# EAGLE board Equalizer_VUMeter (EAGLE 9.6.2), part 1 of 2
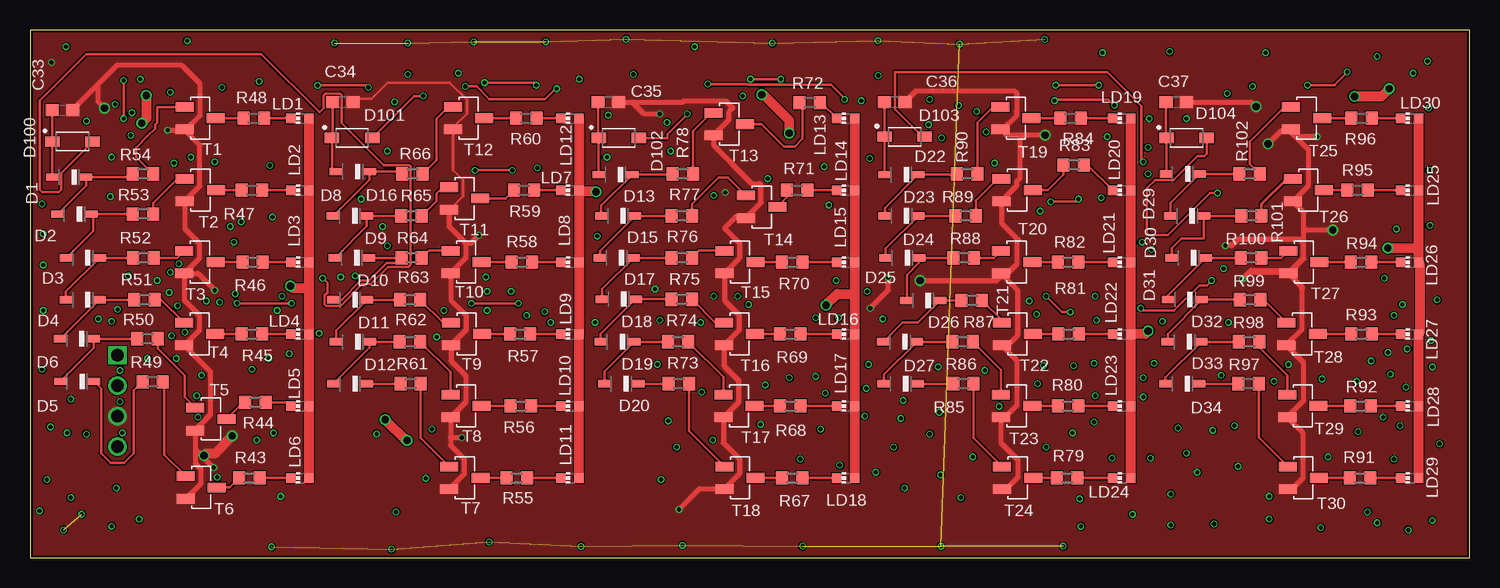
[diagram p0: board, top side]
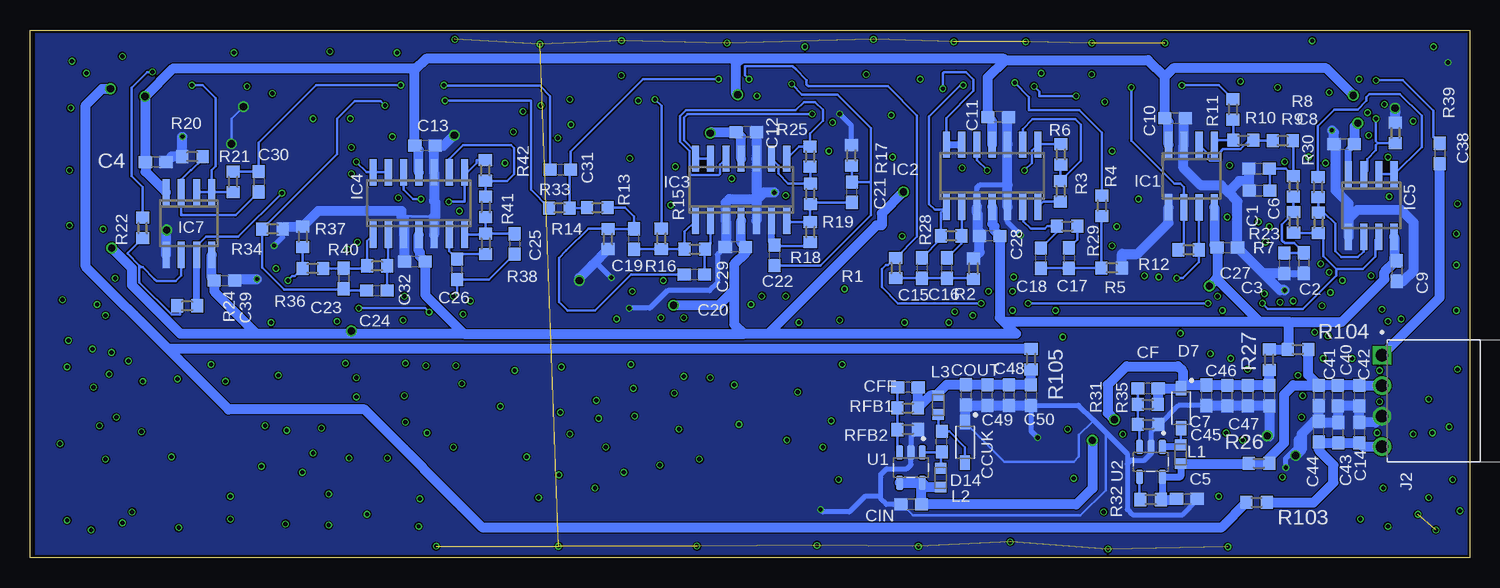
[diagram p1: board, bottom side, seen from below]

Size 120 x 44 mm. Coordinates in mm from the lower left corner, seen from the top.
Outline: 0,44 0,0 120,0 120,44 0,44
Copper layers (1*16): Top 0.018mm / dielectric 1.55mm / Bottom 0.018mm
Design rules "Multi-CB_2L_100µm-Tracks_OL35µm": minimum track width 0.1mm, minimum drill 0.2mm, track to track 0.1mm, track to pad 0.1mm, pad to pad 0.1mm, via to via 0.1mm, smd to smd 0mil, copper to edge 0.2mm, drill to drill 0.2mm, minimum pad ring 0.125mm, minimum via ring 0.1mm, stop-mask expansion 2mil, vias tented up to drill 0.45mm, thermal gap 0.2mm
Net classes: 0 default: width 0.003 mm, drill 0.1 mm

## Footprints (pad centres in the part's own frame; a part is rotated, then mirrored left to right if it is on the bottom)
C0603 = smd 1.1 x 1: 1 -0.85,0; 2 0.85,0
SODFL2512X100N = smd 1.05 x 0.6: A 1.4,0; C -1.4,0
SOD3715X135L32X57N = smd 1.21 x 0.84: 1 -1.68,0; 2 1.68,0
SO08 = smd 0.6 x 2.2: 1 -1.905,-2.6; 2 -0.635,-2.6; 3 0.635,-2.6; 4 1.905,-2.6; 5 1.905,2.6; 6 0.635,2.6; 7 -0.635,2.6; 8 -1.905,2.6
SO14 = smd 0.6 x 2.2: 1 -3.81,-2.6; 2 -2.54,-2.6; 3 -1.27,-2.6; 4 0,-2.6; 5 1.27,-2.6; 6 2.54,-2.6; 7 3.81,-2.6; 8 3.81,2.6; 9 2.54,2.6; 10 1.27,2.6; 11 0,2.6; 12 -1.27,2.6; 13 -2.54,2.6; 14 -3.81,2.6
TE_640455-4 = drill 1.02 pad 1.37 square: 1 0,0 | drill 1.02 pad 1.37: 2 -2.54,0; 3 -5.08,0; 4 -7.62,0
INDC1608X95N = smd 0.9 x 0.97: 1 -0.785,0; 2 0.785,0
CHIP-LED0603 = smd 0.8 x 0.8: A 0,-0.75; C 0,0.75
R0603 = smd 1 x 1.1: 1 -0.85,0; 2 0.85,0
SOT23-3 = smd 0.8 x 1.5: 1 -0.6,-1.35; 2 1.3,-1.35; 3 0.35,1.25
SOT95P280X145-5N = smd 1.21 x 0.59: 1 -1.255,0.95; 2 -1.255,0; 3 -1.255,-0.95; 4 1.255,-0.95; 5 1.255,0.95

## Placement (x,y rotation side)
C1  220n  [C0603]  17.54,32.42 180 bottom
C2  220n  [C0603]  13.81,24.56 270 bottom
C3  100n  [C0603]  15.44,24.53 270 bottom
C4  100n  [C0603]  109.52,32.98 180 bottom
C5  2.2 uF  [C0603]  23.56,4.9 0 bottom
C6  100n  [C0603]  17.5,30.6 180 bottom
C7  4.7 uF  [C0603]  21.95,13.52 270 bottom
C8  100n  [C0603]  10.45,34.49 0 bottom
C9  100n  [C0603]  6.08,23.9 270 bottom
C10  100n  [C0603]  24.55,36.63 180 bottom
C11  100n  [C0603]  39.3,36.75 180 bottom
C12  100n  [C0603]  60.28,35.5 180 bottom
C13  100n  [C0603]  87.07,34.35 180 bottom
C14  10u  [C0603]  9.18,10.41 270 bottom
C15  100n  [C0603]  45.65,24.15 270 bottom
C16  100n  [C0603]  43.55,24.14 90 bottom
C17  100n  [C0603]  33.39,24.98 270 bottom
C18  100n  [C0603]  35.73,24.97 90 bottom
C19  10n  [C0603]  69.63,26.56 90 bottom
C20  10n  [C0603]  64.61,23.61 0 bottom
C21  10n  [C0603]  51.48,30.47 90 bottom
C22  10n  [C0603]  57.92,25.22 90 bottom
C23  10n  [C0603]  93.86,23.27 270 bottom
C24  10n  [C0603]  91.09,22.28 0 bottom
C25  10n  [C0603]  79.6,26.15 270 bottom
C26  10n  [C0603]  84.38,24.04 90 bottom
C27  100n  [C0603]  20.19,25.84 0 bottom
C28  100n  [C0603]  40,26.82 180 bottom
C29  100n  [C0603]  61.2,25.91 180 bottom
C30  12n  [C0603]  100.92,31.35 270 bottom
C31  15n  [C0603]  75.8,32.35 180 bottom
C32  100n  [C0603]  87.91,24.68 180 bottom
C33  200u  [C0603]  2.71,37.3 0 top
C34  100u  [C0603]  26.09,38 0 top
C35  100u  [C0603]  48.2,38 0 top
C36  100u  [C0603]  72.08,38 0 top
C37  200u  [C0603]  95.55,38 0 top
C38  100n  [C0603]  2.5,33.7 270 bottom
C39  100n  [C0603]  103.79,23.1 0 bottom
C40  10u  [C0603]  10.96,13.5 90 bottom
C41  10u  [C0603]  12.56,13.51 270 bottom
C42  10u  [C0603]  9.19,13.5 270 bottom
C43  10u  [C0603]  10.95,10.41 90 bottom
C44  10u  [C0603]  12.56,10.51 90 bottom
C45  10u  [C0603]  20.2,13.5 90 bottom
C46  10u  [C0603]  18.5,13.5 270 bottom
C47  10u  [C0603]  16.7,13.5 270 bottom
C48  10u  [C0603]  40.2,13.55 90 bottom
C49  10u  [C0603]  38.4,13.55 270 bottom
C50  10u  [C0603]  36.55,13.55 270 bottom
CCUK  1 uF  [C0603]  44,9.66 90 bottom
CF  220 pF  [C0603]  26.8,14.1 180 bottom
CFF  330 pF  [C0603]  46.81,14.2 180 bottom
CIN  22 uF  [C0603]  46.54,4.42 180 bottom
COUT  22 uF  [C0603]  41.98,13.57 270 bottom
D1  1N4148WS  [SODFL2512X100N]  3.27,31.72 180 top
D2  1N4148WS  [SODFL2512X100N]  3.71,28.65 180 top
D3  1N4148WS  [SODFL2512X100N]  4.41,25 180 top
D4  1N4148WS  [SODFL2512X100N]  4.4,21.5 180 top
D5  1N4148WS  [SODFL2512X100N]  3.93,14.7 180 top
D6  1N4148WS  [SODFL2512X100N]  3.9,18.25 180 top
D7  [SOD3715X135L32X57N]  24.04,12.46 270 bottom
D8  1N4148WS  [SODFL2512X100N]  26.67,28.5 180 top
D9  1N4148WS  [SODFL2512X100N]  26.84,25 180 top
D10  1N4148WS  [SODFL2512X100N]  26.69,21.5 180 top
D11  1N4148WS  [SODFL2512X100N]  26.92,18 180 top
D12  1N4148WS  [SODFL2512X100N]  26.69,14.5 180 top
D13  1N4148WS  [SODFL2512X100N]  48.81,31.95 180 top
D14  [SOD3715X135L32X57N]  42.05,9.61 270 bottom
D15  1N4148WS  [SODFL2512X100N]  49.02,28.5 180 top
D16  1N4148WS  [SODFL2512X100N]  26.91,32.2 180 top
D17  1N4148WS  [SODFL2512X100N]  48.9,25 180 top
D18  1N4148WS  [SODFL2512X100N]  49.09,21.55 180 top
D19  1N4148WS  [SODFL2512X100N]  48.97,18 180 top
D20  1N4148WS  [SODFL2512X100N]  49.29,14.5 180 top
D22  1N4148WS  [SODFL2512X100N]  72.64,31.95 180 top
D23  1N4148WS  [SODFL2512X100N]  72.65,28.5 180 top
D24  1N4148WS  [SODFL2512X100N]  72.72,25 180 top
D25  1N4148WS  [SODFL2512X100N]  74.46,21.45 180 top
D26  1N4148WS  [SODFL2512X100N]  72.53,18 180 top
D27  1N4148WS  [SODFL2512X100N]  72.59,14.5 180 top
D29  1N4148WS  [SODFL2512X100N]  96.09,32 180 top
D30  1N4148WS  [SODFL2512X100N]  96.46,28.5 180 top
D31  1N4148WS  [SODFL2512X100N]  96.59,25 180 top
D32  1N4148WS  [SODFL2512X100N]  96.28,21.51 180 top
D33  1N4148WS  [SODFL2512X100N]  96.24,18 180 top
D34  1N4148WS  [SODFL2512X100N]  96.07,14.5 180 top
D100  MMSZ5226B-7-F  [SOD3715X135L32X57N]  3.55,34.7 0 top
D101  MMSZ5226B-7-F  [SOD3715X135L32X57N]  26.85,35 0 top
D102  MMSZ5226B-7-F  [SOD3715X135L32X57N]  49.09,35 0 top
D103  MMSZ5226B-7-F  [SOD3715X135L32X57N]  72.91,35.1 0 top
D104  MMSZ5226B-7-F  [SOD3715X135L32X57N]  96.41,35 0 top
IC1  TL072D  [SO08]  23.18,31.82 180 bottom
IC2  TL074D  [SO14]  39.79,31.84 0 bottom
IC3  TL074D  [SO14]  60.72,30.67 0 bottom
IC4  TL074D  [SO14]  87.59,29.53 0 bottom
IC5  TL072D  [SO08]  8.19,29.36 180 bottom
IC7  TL072D  [SO08]  106.75,27.86 180 bottom
J2  640455-4  [TE_640455-4]  7.29,16.88 90 bottom
L1  10 uH  [INDC1608X95N]  24.08,8.61 90 bottom
L2  10 uH  [INDC1608X95N]  44.07,6.66 90 bottom
L3  10 uH  [INDC1608X95N]  44.29,12.72 90 bottom
LD1  [CHIP-LED0603]  22.5,36.64 90 top
LD2  [CHIP-LED0603]  22.5,30.64 90 top
LD3  [CHIP-LED0603]  22.5,24.64 90 top
LD4  [CHIP-LED0603]  22.5,18.64 90 top
LD5  [CHIP-LED0603]  22.5,12.64 90 top
LD6  [CHIP-LED0603]  22.5,6.64 90 top
LD7  [CHIP-LED0603]  45,30.64 90 top
LD8  [CHIP-LED0603]  45,24.64 90 top
LD9  [CHIP-LED0603]  45,18.64 90 top
LD10  [CHIP-LED0603]  45,12.64 90 top
LD11  [CHIP-LED0603]  45,6.64 90 top
LD12  [CHIP-LED0603]  45,36.64 90 top
LD13  [CHIP-LED0603]  68,36.64 90 top
LD14  [CHIP-LED0603]  68,30.64 90 top
LD15  [CHIP-LED0603]  68,24.64 90 top
LD16  [CHIP-LED0603]  68,18.64 90 top
LD17  [CHIP-LED0603]  68,12.64 90 top
LD18  [CHIP-LED0603]  68,6.64 90 top
LD19  [CHIP-LED0603]  91,36.64 90 top
LD20  [CHIP-LED0603]  91,30.64 90 top
LD21  [CHIP-LED0603]  91,24.64 90 top
LD22  [CHIP-LED0603]  91,18.64 90 top
LD23  [CHIP-LED0603]  91,12.64 90 top
LD24  [CHIP-LED0603]  91,6.64 90 top
LD25  [CHIP-LED0603]  115,30.64 90 top
LD26  [CHIP-LED0603]  115,24.64 90 top
LD27  [CHIP-LED0603]  115,18.64 90 top
LD28  [CHIP-LED0603]  115,12.64 90 top
LD29  [CHIP-LED0603]  115,6.64 90 top
LD30  [CHIP-LED0603]  115,36.64 90 top
R1  3.9K  [R0603]  47.83,24.14 270 bottom
R2  3.7K  [R0603]  41.35,24.09 270 bottom
R3  3.3k  [R0603]  34.09,30.56 90 bottom
R4  1.62K  [R0603]  30.65,29.34 270 bottom
R5  1.54K  [R0603]  29.82,24.16 180 bottom
R6  35K  [R0603]  34.07,33.62 90 bottom
R7  10K  [R0603]  14.67,27.96 90 bottom
R8  10K  [R0603]  14.68,30.96 90 bottom
R9  3K  [R0603]  15.56,34.77 180 bottom
R10  23.2K  [R0603]  18.86,34.81 180 bottom
R11  3.3k  [R0603]  19.73,37.38 90 bottom
R12  35K  [R0603]  23.42,25.66 0 bottom
R13  18.2K  [R0603]  72.7,29.19 0 bottom
R14  5.9K  [R0603]  71.82,26.57 90 bottom
R15  53,6K  [R0603]  64.58,25.72 180 bottom
R16  9.76K  [R0603]  67.37,26.59 90 bottom
R17  3.16K  [R0603]  51.52,33.53 270 bottom
R18  29.1K  [R0603]  54.95,27.15 90 bottom
R19  3.3k  [R0603]  54.94,30.33 90 bottom
R20  4K  [R0603]  106.47,33.45 0 bottom
R21  2K  [R0603]  103.07,31.33 90 bottom
R22  3,3K  [R0603]  110.61,27.49 90 bottom
R23  120K  [R0603]  12.6,27.93 270 bottom
R24  22K  [R0603]  106.9,21 0 bottom
R25  35K  [R0603]  54.97,33.44 90 bottom
R26  0  [R0603]  17.55,7.85 180 bottom
R27  0  [R0603]  16.7,16.5 90 bottom
R28  13K  [R0603]  43.21,26.84 180 bottom
R29  5.23K  [R0603]  33.53,27.64 0 bottom
R30  20K  [R0603]  12.63,30.89 270 bottom
R31  68 K  [R0603]  26.81,12.76 0 bottom
R32  51K  [R0603]  26.57,4.83 0 bottom
R33  10.2K  [R0603]  75.87,29.15 180 bottom
R34  1.82K  [R0603]  99.79,27.4 180 bottom
R35  13.3K  [R0603]  26.78,11.1 0 bottom
R36  6.2K  [R0603]  96.43,24.12 180 bottom
R37  1.13K  [R0603]  97.26,26.75 270 bottom
R38  18.2K  [R0603]  82.02,26.17 90 bottom
R39  15.5K  [R0603]  6.18,35.42 90 bottom
R40  29.4K  [R0603]  91.06,24.33 180 bottom
R41  3.3k  [R0603]  82.01,29.24 90 bottom
R42  35K  [R0603]  82.04,32.29 90 bottom
R43  1K  [R0603]  18.28,6.64 180 top
R44  1K  [R0603]  18.81,12.94 180 top
R45  1K  [R0603]  18.5,18.64 180 top
R46  1K  [R0603]  18.57,24.64 180 top
R47  1K  [R0603]  18.5,30.64 180 top
R48  1K  [R0603]  18.66,36.64 180 top
R49  1K  [R0603]  10.23,14.65 180 top
R50  1K  [R0603]  9.81,18.25 180 top
R51  1K  [R0603]  9.56,21.5 180 top
R52  1K  [R0603]  9.46,25 180 top
R53  1K  [R0603]  9.43,28.65 180 top
R54  1K  [R0603]  9.41,32 180 top
R55  1K  [R0603]  40.58,6.64 180 top
R56  1K  [R0603]  40.92,12.64 180 top
R57  1K  [R0603]  40.86,18.64 180 top
R58  1K  [R0603]  41.02,24.64 180 top
R59  1K  [R0603]  41.19,30.64 180 top
R60  1K  [R0603]  41.37,36.64 180 top
R61  1K  [R0603]  31.73,14.5 180 top
R62  1K  [R0603]  31.68,18 180 top
R63  1K  [R0603]  31.68,21.5 180 top
R64  1K  [R0603]  31.82,25 180 top
R65  1K  [R0603]  31.8,28.5 180 top
R66  1K  [R0603]  31.89,32 180 top
R67  1K  [R0603]  63.54,6.64 180 top
R68  1K  [R0603]  63.39,12.64 180 top
R69  1K  [R0603]  63.39,18.64 180 top
R70  1K  [R0603]  63.55,24.64 180 top
R71  1K  [R0603]  63.95,30.64 180 top
R72  1K  [R0603]  65.01,37.94 180 top
R73  1K  [R0603]  54.08,14.5 180 top
R74  1K  [R0603]  54.02,18 180 top
R75  1K  [R0603]  54.32,21.55 180 top
R76  1K  [R0603]  54.34,25 180 top
R77  1K  [R0603]  54.32,28.5 180 top
R78  1K  [R0603]  54.4,32 180 top
R79  1K  [R0603]  86.46,6.64 180 top
R80  1K  [R0603]  86.53,12.64 180 top
R81  1K  [R0603]  86.6,18.64 180 top
R82  1K  [R0603]  86.55,24.64 180 top
R83  1K  [R0603]  87.01,32.74 180 top
R84  1K  [R0603]  86.74,36.64 180 top
R85  1K  [R0603]  77.81,14.5 180 top
R86  1K  [R0603]  77.74,18 180 top
R87  1K  [R0603]  78.51,21.45 180 top
R88  1K  [R0603]  77.84,25 180 top
R89  1K  [R0603]  78.01,28.5 180 top
R90  1K  [R0603]  78.13,32 180 top
R91  1K  [R0603]  110.87,6.64 180 top
R92  1K  [R0603]  110.92,12.64 180 top
R93  1K  [R0603]  110.99,18.64 180 top
R94  1K  [R0603]  110.96,24.64 180 top
R95  1K  [R0603]  110.67,30.64 180 top
R96  1K  [R0603]  111.02,36.64 180 top
R97  1K  [R0603]  101.57,14.5 180 top
R98  1K  [R0603]  101.64,18 180 top
R99  1K  [R0603]  101.7,21.5 180 top
R100  1K  [R0603]  101.79,25 180 top
R101  1K  [R0603]  101.81,28.5 180 top
R102  1K  [R0603]  101.66,32 180 top
R103  0  [R0603]  17.75,4.6 180 bottom
R104  0  [R0603]  14.3,17.35 0 bottom
R105  0  [R0603]  36.55,16.55 90 bottom
RFB1  29.4K  [R0603]  46.83,12.48 180 bottom
RFB2  5.76K  [R0603]  46.82,10.67 0 bottom
T1  BC846A  [SOT23-3]  14.23,37 270 top
T2  BC846A  [SOT23-3]  14.26,31 270 top
T3  BC846A  [SOT23-3]  14.22,25 270 top
T4  BC846A  [SOT23-3]  14.21,19 270 top
T5  BC846A  [SOT23-3]  15.13,11.9 270 top
T6  BC846A  [SOT23-3]  14.33,6.2 270 top
T7  BC846A  [SOT23-3]  36.3,7 270 top
T8  BC846A  [SOT23-3]  36.41,13 270 top
T9  BC846A  [SOT23-3]  36.45,19 270 top
T10  BC846A  [SOT23-3]  36.42,25 270 top
T11  BC846A  [SOT23-3]  36.29,30.3 270 top
T12  BC846A  [SOT23-3]  36.62,37 270 top
T13  BC846A  [SOT23-3]  58.34,36.5 270 top
T14  BC846A  [SOT23-3]  61.05,29.6 270 top
T15  BC846A  [SOT23-3]  59.25,25 270 top
T16  BC846A  [SOT23-3]  59.2,19 270 top
T17  BC846A  [SOT23-3]  59.16,13 270 top
T18  BC846A  [SOT23-3]  59.25,7 270 top
T19  BC846A  [SOT23-3]  82.24,37 270 top
T20  BC846A  [SOT23-3]  82.34,31 270 top
T21  BC846A  [SOT23-3]  82.3,25 270 top
T22  BC846A  [SOT23-3]  82.37,19 270 top
T23  BC846A  [SOT23-3]  82.3,13 270 top
T24  BC846A  [SOT23-3]  82.38,7 270 top
T25  BC846A  [SOT23-3]  106.47,37 270 top
T26  BC846A  [SOT23-3]  106.62,31 270 top
T27  BC846A  [SOT23-3]  106.25,25 270 top
T28  BC846A  [SOT23-3]  106.1,19 270 top
T29  BC846A  [SOT23-3]  106.17,13 270 top
T30  BC846A  [SOT23-3]  106.19,7 270 top
U1  LM2611  [SOT95P280X145-5N]  46.56,7.5 270 bottom
U2  LMR62014  [SOT95P280X145-5N]  26.55,7.97 270 bottom

## Library data of the parts
C1-C4 C6 C8-C37 C39-C50 R1-R105 RFB1 RFB2 = rcl
C5 C7 C38 CCUK CF CFF CIN COUT = rcl; SPICEPREFIX: C
D1-D6 D8-D13 D15-D20 D22-D27 D29-D34 = 1N4148WS; AVAILABILITY: Good; DESCRIPTION: Diode Standard 75V 150mA Surface Mount SOD-323F; MF: ON Semiconductor; MP: 1N4148WS; PACKAGE: SOD-323FL-2 ON Semiconductor; PRICE: None; PURCHASE-URL: https://pricing.snapeda.com/search/part/1N4148WS/?ref=eda
D7 D14 D100-D104 = MMSZ5226B-7-F; AVAILABILITY: Good; DESCRIPTION: Zener Diode 3.3V 500mW ±5% Surface Mount SOD-123; MF: Diodes Inc.; MP: MMSZ5226B-7-F; PACKAGE: SOD-123 Diodes Inc.; PRICE: None; PURCHASE-URL: https://pricing.snapeda.com/search/part/MMSZ5226B-7-F/?ref=eda
IC1-IC5 IC7 = linear
J2 = 640455-4; AVAILABILITY: In Stock; CENTERLINE_PITCH: 2.54 mm[.1 in]; COMMENT: 640455-4; DESCRIPTION: Headers & Receptacles cable a placa 8 POS MONO SHAPE MKII TAB ASS'Y GW 750.N TYCO / TE CONNECTIVITY; MF: TE Connectivity; MP: 640455-4; NUMBER_OF_POSITIONS: 4; PACKAGE: None; PRICE: None; PRODUCT_TYPE: Connector; PURCHASE-URL: https://pricing.snapeda.com/search/part/640455-4/?ref=eda
L1-L3 = ASMCI-0603-100M-T; AVAILABILITY: Good; DESCRIPTION: 10µH Shielded Multilayer Inductor 50mA 900mOhm 0603 (1608 Metric); MF: Abracon LLC; MP: ASMCI-0603-100M-T; PACKAGE: 1608 Taiyo Yuden; PRICE: None; PURCHASE-URL: https://pricing.snapeda.com/search/part/ASMCI-0603-100M-T/?ref=eda
LD1-LD30 = led
T1-T9 T11-T30 = BC846A; AVAILABILITY: Unavailable; DESCRIPTION: Bipolar (BJT) Transistor NPN 65V 100mA 100MHz 300mW Surface Mount SOT-23-3 (TO-236); MF: ON Semiconductor; MP: BC846A; PACKAGE: SOT-23-3 Motorola; PRICE: None
T10 = BC846A; AVAILABILITY: Unavailable; DESCRIPTION: Bipolar (BJT) Transistor NPN 65V 100mA 100MHz 300mW Surface Mount SOT-23-3 (TO-236); MF: ON Semiconductor; MP: BC846A; PACKAGE: SOT-23-3 Motorola; PRICE: None; SPICEPREFIX: J
U1 = LM2611BMFX_NOPB; AVAILABILITY: Good; DESCRIPTION: 1.4MHz Cuk Converter 5-SOT-23 -40 to 125; MF: Texas Instruments; MP: LM2611BMFX/NOPB; PACKAGE: SOT-23-5 Texas Instruments; PRICE: None; PURCHASE-URL: https://pricing.snapeda.com/search/part/LM2611BMFX/NOPB/?ref=eda
U2 = LMR62014XMF_NOPB; AVAILABILITY: Good; DESCRIPTION: SIMPLE SWITCHER&reg; 2.7V to 14V, 1.4A Step-Up Regulator in SOT-23 Package 5-SOT-23 -40 to 125; MF: Texas Instruments; MP: LMR62014XMF/NOPB; PACKAGE: SOT-23-5 Texas Instruments; PRICE: None; PURCHASE-URL: https://pricing.snapeda.com/search/part/LMR62014XMF/NOPB/?ref=eda

## Nets
+7,5V: C7.1 C45.2 C46.1 C47.1 CF.1 CIN.1 D7.1 L2.1 R27.1 R31.2 U1.4 U1.5
-7,5V: C48.2 C49.1 C50.1 CFF.1 COUT.1 L3.2 R105.1 RFB1.1
BP1_OUT: D101.2 IC2.13 IC2.14
BP2_OUT: D102.2 IC3.13 IC3.14
BP3_OUT: D103.2 IC4.13 IC4.14
GND: C1.2 C2.2 C3.2 C4.1 C5.2 C6.2 C7.2 C8.1 C9.2 C10.1 C11.1 C12.1 C13.1 C14.1 C27.2 C28.2 C29.2 C32.2 C33.2 C34.2 C35.2 C36.2 C37.2 C39.2 C40.1 C41.2 C42.2 C43.2 C44.2 C45.1 C46.2 C47.2 C48.1 C49.2 C50.2 CIN.2 COUT.2 D14.1 IC1.3 IC1.5 IC2.3 IC2.5 IC2.10 IC3.3 IC3.5 IC3.10 IC4.3 IC4.5 IC4.10 IC5.5 IC7.5 J2.3 R2.1 R5.1 R14.1 R17.1 R20.1 R34.1 R35.2 R37.1 R39.2 RFB2.2 T1.2 T2.2 T3.2 T4.2 T5.2 T6.2 T7.2 T8.2 T9.2 T10.2 T11.2 T12.2 T13.2 T14.2 T15.2 T16.2 T17.2 T18.2 T19.2 T20.2 T21.2 T22.2 T23.2 T24.2 T25.2 T26.2 T27.2 T28.2 T29.2 T30.2 U1.2 U2.2
HP_OUT: D104.2 IC7.7 R24.2
IN2,1V: C38.2 J2.1
MAIN-5V: C14.2 C43.1 C44.1 J2.4 R103.1
N$2: C1.1 C6.1 R8.2 R9.1
N$3: IC1.2 R9.2 R10.1
N$4: C2.1 C3.1 R7.2 R8.1
N$5: C31.1 IC5.7 R1.1 R7.1 R13.1 R23.2 R33.1
N$7: IC2.9 R3.2 R6.1
N$8: IC1.1 R10.2 R11.1
N$9: IC3.9 R19.2 R25.1
N$10: IC1.6 R11.2 R12.1
N$11: C15.2 C16.1 R1.2 R2.2
N$12: C16.2 IC2.2 R28.1
N$13: C15.1 IC2.1 R4.1 R28.2
N$15: C19.2 C20.1 R13.2 R14.2
N$16: C17.1 R29.2
N$17: C18.2 IC2.6 R29.1
N$18: C21.1 IC3.7 R18.2 R19.1
N$19: C20.2 IC3.2 R15.1
N$20: C19.1 IC3.1 R15.2 R16.1
N$21: R32.1 U2.4
N$22: CF.2 R31.1 R35.1 U2.3
N$23: C21.2 C22.1 R16.2 R17.2
N$24: C22.2 IC3.6 R18.1
N$25: IC4.8 IC4.12 R42.2
N$26: C23.1 IC4.1 R36.1 R40.2
N$27: C23.2 C24.1 R33.2 R34.2
N$28: C24.2 IC4.2 R40.1
N$29: IC5.6 R23.1 R30.2
N$30: D15.C D17.A R77.2
N$31: C25.2 C26.1 R36.2 R37.2
N$32: C26.2 IC4.6 R38.1
N$33: D17.C D18.A R76.2
N$34: C30.2 IC7.3 R20.2
N$35: C17.2 C18.1 R4.2 R5.2
N$36: IC7.1 IC7.2 R21.1 R22.2
N$37: D23.C D24.A R89.2
N$38: C30.1 C31.2 R21.2
N$39: IC7.6 R22.1 R24.1
N$40: LD6.C R43.1
N$41: LD5.C R44.1
N$42: IC5.1 IC5.2 R30.1
N$43: LD4.C R45.1
N$44: LD3.C R46.1
N$45: LD2.C R47.1
N$46: LD1.C R48.1
N$47: C38.1 IC5.3 R39.1
N$48: C25.1 IC4.7 R38.2 R41.1
N$49: R43.2 T6.3
N$50: R44.2 T5.3
N$51: R45.2 T4.3
N$52: R46.2 T3.3
N$53: R47.2 T2.3
N$54: R48.2 T1.3
N$55: R49.1 T6.1
N$56: R50.1 T5.1
N$57: R51.1 T4.1
N$58: R52.1 T3.1
N$59: R53.1 T2.1
N$60: R54.1 T1.1
N$61: C33.1 D1.A D100.1
N$62: D1.C D2.A R54.2
N$63: D2.C D3.A R53.2
N$64: D3.C D4.A R52.2
N$65: D4.C D6.A R51.2
N$66: D5.A D6.C R50.2
N$67: D5.C R49.2
N$68: LD11.C R55.1
N$69: LD10.C R56.1
N$70: LD9.C R57.1
N$71: LD8.C R58.1
N$72: LD7.C R59.1
N$73: LD12.C R60.1
N$74: D7.2 L1.2 U2.1
N$75: R55.2 T7.3
N$76: R56.2 T8.3
N$77: R57.2 T9.3
N$78: R58.2 T10.3
N$79: R59.2 T11.3
N$80: R60.2 T12.3
N$81: R61.1 T7.1
N$82: R62.1 T8.1
N$83: R63.1 T9.1
N$84: R64.1 T10.1
N$85: R65.1 T11.1
N$86: R66.1 T12.1
N$87: C34.1 D16.A D101.1
N$88: D8.A D16.C R66.2
N$89: D8.C D9.A R65.2
N$90: D9.C D10.A R64.2
N$91: D10.C D11.A R63.2
N$92: D11.C D12.A R62.2
N$93: D12.C R61.2
N$94: LD18.C R67.1
N$95: LD17.C R68.1
N$96: LD16.C R69.1
N$97: LD15.C R70.1
N$98: LD14.C R71.1
N$99: LD13.C R72.1
N$100: IC3.8 IC3.12 R25.2
N$101: R67.2 T18.3
N$102: R68.2 T17.3
N$103: R69.2 T16.3
N$104: R70.2 T15.3
N$105: R71.2 T14.3
N$106: R72.2 T13.3
N$107: R73.1 T18.1
N$108: R74.1 T17.1
N$109: R75.1 T16.1
N$110: R76.1 T15.1
N$111: R77.1 T14.1
N$112: R78.1 T13.1
N$113: C35.1 D13.A D102.1
N$114: D13.C D15.A R78.2
N$115: IC2.8 IC2.12 R6.2
N$117: D18.C D19.A R75.2
N$118: D19.C D20.A R74.2
N$119: D20.C R73.2
N$120: LD24.C R79.1
N$121: LD23.C R80.1
N$122: LD22.C R81.1
N$123: LD21.C R82.1
N$124: LD20.C R83.1
N$125: LD19.C R84.1
N$126: CCUK.2 D14.2 L3.1
N$127: R79.2 T24.3
N$128: R80.2 T23.3
N$129: R81.2 T22.3
N$130: R82.2 T21.3
N$131: R83.2 T20.3
N$132: R84.2 T19.3
N$133: R85.1 T24.1
N$134: R86.1 T23.1
N$135: R87.1 T22.1
N$136: R88.1 T21.1
N$137: R89.1 T20.1
N$138: R90.1 T19.1
N$139: C36.1 D22.A D103.1
N$140: D22.C D23.A R90.2
N$141: CCUK.1 L2.2 U1.1
N$142: D24.C D25.A R88.2
N$143: D25.C D26.A R87.2
N$144: D26.C D27.A R86.2
N$145: D27.C R85.2
N$146: LD29.C R91.1
N$147: LD28.C R92.1
N$148: LD27.C R93.1
N$149: LD26.C R94.1
N$150: LD25.C R95.1
N$151: LD30.C R96.1
N$152: CFF.2 RFB1.2 RFB2.1 U1.3
N$153: R91.2 T30.3
N$154: R92.2 T29.3
N$155: R93.2 T28.3
N$156: R94.2 T27.3
N$157: R95.2 T26.3
N$158: R96.2 T25.3
N$159: R97.1 T30.1
N$160: R98.1 T29.1
N$161: R99.1 T28.1
N$162: R100.1 T27.1
N$163: R101.1 T26.1
N$164: R102.1 T25.1
N$165: C37.1 D29.A D104.1
N$166: D29.C D30.A R102.2
N$167: D30.C D31.A R101.2
N$168: D31.C D32.A R100.2
N$169: D32.C D33.A R99.2
N$170: D33.C D34.A R98.2
N$171: D34.C R97.2
N$181: IC2.7 R3.1
N$183: IC4.9 R41.2 R42.1
PB5V: C5.1 C40.2 C41.1 C42.1 J2.2 L1.1 R26.1 R26.2 R32.2 R104.2 U2.5
TP_OUT: D100.2 IC1.7 R12.2
V+: C9.1 C27.1 C28.1 C29.1 C32.1 C39.1 IC1.8 IC2.4 IC3.4 IC4.4 IC5.8 IC7.8 LD1.A LD2.A LD3.A LD4.A LD5.A LD6.A LD7.A LD8.A LD9.A LD10.A LD11.A LD12.A LD13.A LD14.A LD15.A LD16.A LD17.A LD18.A LD19.A LD20.A LD21.A LD22.A LD23.A LD24.A LD25.A LD26.A LD27.A LD28.A LD29.A LD30.A R27.2 R104.1
V-: C4.2 C8.2 C10.2 C11.2 C12.2 C13.2 IC1.4 IC2.11 IC3.11 IC4.11 IC5.4 IC7.4 R103.2 R105.2